# EAGLE board clock (EAGLE 9.6.1)

Size 160 x 100 mm. Coordinates in mm from the lower left corner, seen from the top.
Outline: 0,0 160,0 160,100 0,100 0,0
Copper layers (1*16): Top 0.035mm / dielectric 1.5mm / Bottom 0.035mm
Design rules "default": minimum track width 6mil, minimum drill 0.35mm, track to track 6mil, track to pad 6mil, pad to pad 6mil, via to via 6mil, smd to smd 6mil, copper to edge 40mil, drill to drill 6mil, minimum pad ring 10mil, minimum via ring 8mil, stop-mask expansion 4mil, vias tented up to drill 0mil, thermal gap 10mil

## Footprints (pad centres in the part's own frame; a part is rotated, then mirrored left to right if it is on the bottom)
N14 = drill 0.787 pad 1.295 square: 1 -7.62,15.24 | drill 0.787 pad 1.295: 2 -7.62,12.7; 3 -7.62,10.16; 4 -7.62,7.62; 5 -7.62,5.08; 6 -7.62,2.54; 7 -7.62,0; 8 0,0; 9 0,2.54; 10 0,5.08; 11 0,7.62; 12 0,10.16; 13 0,12.7; 14 0,15.24
N16 = drill 0.787 pad 1.295 square: 1 -7.62,17.78 | drill 0.787 pad 1.295: 2 -7.62,15.24; 3 -7.62,12.7; 4 -7.62,10.16; 5 -7.62,7.62; 6 -7.62,5.08; 7 -7.62,2.54; 8 -7.62,0; 9 0,0; 10 0,2.54; 11 0,5.08; 12 0,7.62; 13 0,10.16; 14 0,12.7; 15 0,15.24; 16 0,17.78

## Placement (x,y rotation side)
AND1  SN74F08N  [N14]  -76.2,67.31 0 top  (outside the outline)
AND2  SN74F08N  [N14]  -88.9,67.31 0 top  (outside the outline)
HI_MIN_ADDER  SN74LS283N  [N16]  -36.83,22.86 0 top  (outside the outline)
HI_MIN_AND  SN74F08N  [N14]  -63.5,67.31 0 top  (outside the outline)
HI_MIN_REG  SN74LS194AN  [N16]  -38.1,1.27 0 top  (outside the outline)
HI_SEC_MUX  CD4052BE  [N16]  -77.47,44.45 0 top  (outside the outline)
HR_ADDER  SN74LS283N  [N16]  -19.05,44.45 0 top  (outside the outline)
HR_AND  SN74F08N  [N14]  -17.78,87.63 0 top  (outside the outline)
HR_REG  SN74LS194AN  [N16]  -54.61,1.27 0 top  (outside the outline)
JKFF0  SN74HC109N  [N16]  -52.07,22.86 0 top  (outside the outline)
LO_MIN_MUX  CD4052BE  [N16]  -63.5,44.45 0 top  (outside the outline)
LO_SEC_ADDER  SN74LS283N  [N16]  -21.59,1.27 0 top  (outside the outline)
LO_SEC_AND  SN74F08N  [N14]  -49.53,67.31 0 top  (outside the outline)
LO_SEC_REG  SN74LS194AN  [N16]  -71.12,1.27 0 top  (outside the outline)
MS_ADDER  SN74LS283N  [N16]  -34.29,44.45 0 top  (outside the outline)
MS_AND  SN74F08N  [N14]  -30.48,87.63 0 top  (outside the outline)
MS_REG  SN74LS194AN  [N16]  -87.63,1.27 0 top  (outside the outline)
MUX1  SN74HC157N  [N16]  -67.31,22.86 0 top  (outside the outline)
MUX2  SN74HC157N  [N16]  -82.55,22.86 0 top  (outside the outline)
NAND0  SN74HC00N  [N14]  -92.71,45.72 0 top  (outside the outline)
NAND1  SN74HC00N  [N14]  -19.05,67.31 0 top  (outside the outline)
OR0  SN74F32N  [N14]  -43.18,87.63 0 top  (outside the outline)
OR1  SN74F32N  [N14]  -55.88,87.63 0 top  (outside the outline)
OR2  SN74F32N  [N14]  -68.58,87.63 0 top  (outside the outline)
SPLI_REG  SN74LS194AN  [N16]  -20.32,22.86 0 top  (outside the outline)
SPLIT_ADDER  SN74LS283N  [N16]  -49.53,44.45 0 top  (outside the outline)
U1  SN74HC109N  [N16]  -97.79,22.86 0 top  (outside the outline)
U2  SN74HC00N  [N14]  -34.29,67.31 0 top  (outside the outline)

## Library data of the parts
AND1 AND2 HI_MIN_AND HR_AND LO_SEC_AND MS_AND = sn74f08n; DATASHEET_URL: http://www.ti.com/lit/gpn/SN74F08; DESCRIPTION: Quadruple 2-Input Positive-AND Gate; FAMILY_NAME: AND GATE; GENERIC_PART_NUMBER: SN74F08; INDUSTRY_STD_PKG_TYPE: PDIP; MANUFACTURER: Texas Instruments; PACKAGE_DESIGNATOR: N; PIN_COUNT: 14
HI_MIN_ADDER HR_ADDER LO_SEC_ADDER MS_ADDER SPLIT_ADDER = sn74ls283n; DATASHEET_URL: http://www.ti.com/lit/gpn/SN74LS283; DESCRIPTION: 4-Bit Binary Full Adders With Fast Carry; FAMILY_NAME: ADDER; GENERIC_PART_NUMBER: SN74LS283; INDUSTRY_STD_PKG_TYPE: PDIP; MANUFACTURER: Texas Instruments; PACKAGE_DESIGNATOR: N; PIN_COUNT: 16
HI_MIN_REG HR_REG LO_SEC_REG MS_REG SPLI_REG = sn74ls194an; DATASHEET_URL: http://www.ti.com/lit/gpn/SN74LS194A; DESCRIPTION: Bidirectional universal shift registers; FAMILY_NAME: SHIFT REGISTER; GENERIC_PART_NUMBER: SN74LS194A; INDUSTRY_STD_PKG_TYPE: PDIP; MANUFACTURER: Texas Instruments; PACKAGE_DESIGNATOR: N; PIN_COUNT: 16
HI_SEC_MUX LO_MIN_MUX = cd4052be; DATASHEET_URL: http://www.ti.com/lit/gpn/CD4052B; DESCRIPTION: CMOS Differential 4-Channel Analog Multiplexer/Demultiplexer with Logic-Level Conversion; FAMILY_NAME: ANALOG SWITCH/MULTIPLEXER (greater than 5V); GENERIC_PART_NUMBER: CD4052B; INDUSTRY_STD_PKG_TYPE: PDIP; MANUFACTURER: Texas Instruments; PACKAGE_DESIGNATOR: N; PIN_COUNT: 16
JKFF0 U1 = sn74hc109n; DATASHEET_URL: http://www.ti.com/lit/gpn/SN74HC109; DESCRIPTION: Dual J-K Positive-Edge-Triggered Flip-Flops With Clear and Preset; FAMILY_NAME: J-K FLIPFLOP; GENERIC_PART_NUMBER: SN74HC109; INDUSTRY_STD_PKG_TYPE: PDIP; MANUFACTURER: Texas Instruments; PACKAGE_DESIGNATOR: N; PIN_COUNT: 16
MUX1 MUX2 = sn74hc157n; DATASHEET_URL: http://www.ti.com/lit/gpn/SN74HC157; DESCRIPTION: Quadruple 2-Line To 1-Line Data Selectors/Multiplexers; FAMILY_NAME: DATA SELECTOR/MULTIPLEXER; GENERIC_PART_NUMBER: SN74HC157; INDUSTRY_STD_PKG_TYPE: PDIP; MANUFACTURER: Texas Instruments; PACKAGE_DESIGNATOR: N; PIN_COUNT: 16
NAND0 NAND1 U2 = sn74hc00n; DATASHEET_URL: http://www.ti.com/lit/gpn/SN74HC00; DESCRIPTION: Quad 2-Input Positive-NAND Gates; FAMILY_NAME: NAND GATE; GENERIC_PART_NUMBER: SN74HC00; INDUSTRY_STD_PKG_TYPE: PDIP; MANUFACTURER: Texas Instruments; PACKAGE_DESIGNATOR: N; PIN_COUNT: 14
OR0 OR1 OR2 = sn74f32n; DATASHEET_URL: http://www.ti.com/lit/gpn/SN74F32; DESCRIPTION: Quad 2-input positive-OR gates; FAMILY_NAME: OR GATE; GENERIC_PART_NUMBER: SN74F32; INDUSTRY_STD_PKG_TYPE: PDIP; MANUFACTURER: Texas Instruments; PACKAGE_DESIGNATOR: N; PIN_COUNT: 14

## Nets
1_HZ: MUX1.2 MUX1.5 NAND0.11 U1.4 U1.12
+5V: AND1.14 AND2.14 HI_MIN_ADDER.16 HI_MIN_AND.14 HI_MIN_REG.16 HI_SEC_MUX.16 HR_ADDER.7 HR_ADDER.16 HR_AND.14 HR_REG.16 JKFF0.5 JKFF0.16 LO_MIN_MUX.16 LO_SEC_ADDER.7 LO_SEC_ADDER.16 LO_SEC_AND.14 LO_SEC_REG.16 MS_ADDER.7 MS_ADDER.16 MS_AND.14 MS_REG.9 MS_REG.10 MS_REG.16 MUX1.16 MUX2.16 NAND0.14 NAND1.14 OR0.14 OR1.14 OR2.14 SPLI_REG.16 SPLIT_ADDER.15 SPLIT_ADDER.16 U1.2 U1.5 U1.11 U1.16 U2.14
ADD_1HR: OR2.9 OR2.12
ADD_1MIN: OR1.4
ADD_5MIN: OR1.5
AM: JKFF0.6
CLK: HI_MIN_REG.11 HR_REG.11 JKFF0.4 LO_SEC_REG.11 MS_REG.11 SPLI_REG.11
CLKEN_INV: MUX1.1 MUX2.1
CLR_SEC_INV: NAND0.5 OR0.2 OR0.10
GND: AND1.7 AND2.7 HI_MIN_ADDER.3 HI_MIN_ADDER.6 HI_MIN_ADDER.8 HI_MIN_ADDER.11 HI_MIN_ADDER.14 HI_MIN_AND.7 HI_MIN_REG.8 HI_SEC_MUX.4 HI_SEC_MUX.5 HI_SEC_MUX.6 HI_SEC_MUX.7 HI_SEC_MUX.8 HI_SEC_MUX.11 HI_SEC_MUX.14 HR_ADDER.3 HR_ADDER.6 HR_ADDER.8 HR_AND.7 HR_REG.8 JKFF0.8 LO_MIN_MUX.2 LO_MIN_MUX.4 LO_MIN_MUX.6 LO_MIN_MUX.7 LO_MIN_MUX.8 LO_MIN_MUX.11 LO_MIN_MUX.15 LO_SEC_ADDER.3 LO_SEC_ADDER.6 LO_SEC_ADDER.8 LO_SEC_AND.7 LO_SEC_REG.8 MS_ADDER.3 MS_ADDER.6 MS_ADDER.8 MS_ADDER.11 MS_ADDER.14 MS_AND.7 MS_REG.8 MUX1.8 MUX2.8 MUX2.15 NAND0.7 NAND1.7 OR0.7 OR1.7 OR2.7 SPLI_REG.8 SPLIT_ADDER.2 SPLIT_ADDER.6 SPLIT_ADDER.8 SPLIT_ADDER.11 U1.3 U1.8 U2.7
HI_MIN_ADD_2: AND1.2 HI_MIN_ADDER.13 HI_MIN_AND.1
HI_MIN_ADD_!: AND2.12 HI_MIN_ADDER.1 HI_MIN_AND.9
HI_MIN_ADD_MSB: AND1.1 HI_MIN_ADDER.10 HI_MIN_AND.5
HI_MIN_QA: HI_MIN_ADDER.12 HI_MIN_REG.15 HR_REG.7
HI_MIN_QB: HI_MIN_ADDER.15 HI_MIN_REG.14
HI_MIN_QC: HI_MIN_ADDER.2 HI_MIN_REG.13
HI_MIN_QD: HI_MIN_ADDER.5 HI_MIN_REG.12
HI_MIN_RST_INV: HI_MIN_AND.2 HI_MIN_AND.4 HI_MIN_AND.10 HI_MIN_AND.12 NAND1.6
HI_MIN_S0: HI_MIN_REG.9 MUX2.7
HI_MIN_S1: HI_MIN_REG.10 MUX2.4
HR_ADD_1: HR_ADDER.1 HR_AND.9 OR2.4
HR_ADD_2: HR_ADDER.13 HR_AND.1 OR2.5
HR_ADD_MSB: AND1.10 HR_ADDER.10 HR_AND.5
HR_QA: HR_ADDER.12 HR_REG.15
HR_QB: HR_ADDER.15 HR_REG.14
HR_QC: HR_ADDER.2 HR_REG.13
HR_QD: HI_MIN_REG.2 HR_ADDER.5 HR_REG.12
HR_RST_INV: HR_AND.2 HR_AND.4 HR_AND.10 HR_AND.12 NAND1.3
HR_S0: HR_REG.9 MUX2.12
HR_S1: HR_REG.10 MUX2.9
LO_SEC_ADD_1: LO_SEC_ADDER.1 LO_SEC_AND.9
LO_SEC_ADD_2: AND2.2 LO_SEC_ADDER.13 LO_SEC_AND.1
LO_SEC_M1: MUX1.3 MUX1.10 OR0.3
LO_SEC_M2: MUX1.6 MUX1.13 OR0.8
LO_SEC_QA: LO_SEC_ADDER.12 LO_SEC_REG.15 SPLI_REG.7
LO_SEC_QB: LO_SEC_ADDER.15 LO_SEC_REG.14
LO_SEC_QC: LO_SEC_ADDER.2 LO_SEC_REG.13
LO_SEC_QD: LO_SEC_ADDER.5 LO_SEC_REG.12 MS_REG.2
LO_SEC_RST_INV: LO_SEC_AND.2 LO_SEC_AND.4 LO_SEC_AND.10 LO_SEC_AND.12 NAND0.8
LO_SEC_S0: LO_SEC_REG.9 MUX1.7
LO_SEC_S1: LO_SEC_REG.10 MUX1.4
M0: OR0.9 OR1.12 OR2.13
M1: OR0.1 OR1.10 OR2.10
MS_ADD_1: MS_ADDER.13 MS_AND.1 OR0.12
MS_ADD_2: MS_ADDER.4 MS_AND.9 OR0.13
MS_ADD_MSB: MS_ADDER.10 MS_AND.5 NAND0.1
MS_QA: LO_SEC_REG.7 MS_ADDER.12 MS_REG.15
MS_QB: MS_ADDER.15 MS_REG.14
MS_QC: MS_ADDER.2 MS_REG.13
MS_QD: MS_ADDER.5 MS_REG.12
MS_RST_INV: MS_AND.2 MS_AND.4 MS_AND.10 MS_AND.12 NAND0.6
MVOE: LO_MIN_MUX.14 SPLIT_ADDER.13
N$1: HR_AND.6 HR_REG.3
N$2: HR_AND.3 HR_REG.4
N$3: HR_AND.11 HR_REG.5
N$4: HR_AND.8 HR_REG.6
N$5: HR_ADDER.4 HR_AND.13
N$6: MS_AND.6 MS_REG.3
N$7: MS_AND.3 MS_REG.4
N$8: MS_AND.11 MS_REG.5
N$9: MS_AND.8 MS_REG.6
N$10: MS_ADDER.1 MS_AND.13
N$11: NAND0.2 OR0.11
N$12: LO_SEC_AND.6 LO_SEC_REG.3
N$13: LO_SEC_AND.3 LO_SEC_REG.4
N$14: HR_ADDER.11 HR_ADDER.14
N$15: LO_SEC_AND.11 LO_SEC_REG.5
N$16: LO_SEC_AND.8 LO_SEC_REG.6
N$17: LO_SEC_ADDER.4 LO_SEC_AND.13
N$18: LO_SEC_ADDER.11 LO_SEC_ADDER.14
N$19: HI_MIN_AND.6 HI_MIN_REG.3
N$20: HI_MIN_AND.3 HI_MIN_REG.4
N$21: HI_MIN_AND.11 HI_MIN_REG.5
N$22: HI_MIN_AND.8 HI_MIN_REG.6
N$23: AND2.13 HI_MIN_ADDER.4 HI_MIN_AND.13
N$25: MUX1.9 SPLI_REG.10
N$26: MUX1.12 SPLI_REG.9
N$28: MUX1.11 MUX1.14
N$29: HI_MIN_ADDER.7 SPLIT_ADDER.9
N$30: HI_SEC_MUX.3 SPLI_REG.6
N$31: AND1.9 OR2.6
N$32: LO_MIN_MUX.3 SPLI_REG.3
N$34: AND1.5 AND2.11
N$35: MUX2.13 OR2.11
N$36: AND2.5 AND2.8
N$37: AND2.6 OR1.1
N$38: HI_SEC_MUX.9 LO_MIN_MUX.9 MUX2.2 MUX2.5 NAND0.9 NAND0.10 OR1.3
N$39: OR1.2 OR1.6 OR1.9 OR1.13
N$40: AND2.9 HI_SEC_MUX.1 HI_SEC_MUX.2 SPLIT_ADDER.4
N$41: AND2.10 HI_SEC_MUX.12 HI_SEC_MUX.15 SPLIT_ADDER.1
N$42: HI_SEC_MUX.13 SPLI_REG.5
N$43: LO_MIN_MUX.13 SPLI_REG.4
N$44: LO_MIN_MUX.5 SPLIT_ADDER.10
N$45: MUX2.10 OR2.8
N$47: AND1.3 AND1.4
N$48: NAND0.3 NAND0.4 NAND0.12 NAND0.13
N$50: AND1.6 HI_SEC_MUX.10 LO_MIN_MUX.10 MUX2.11 MUX2.14 NAND1.4 NAND1.5
N$51: MUX2.3 OR1.8
N$52: MUX2.6 OR1.11
N$53: AND2.3 AND2.4
N$54: AND1.8 NAND1.1 NAND1.2 OR2.2
N$55: AND2.1 LO_SEC_ADDER.10 LO_SEC_AND.5
N$57: JKFF0.2 NAND1.9 NAND1.10 OR2.3
N$58: JKFF0.3 NAND1.8
PM: JKFF0.7
RST_INV: HI_MIN_REG.1 HR_REG.1 JKFF0.1 LO_SEC_REG.1 MS_REG.1 SPLI_REG.1 U1.1 U1.15
SL_IN: MS_REG.7
SPLIT_QA: HI_MIN_REG.7 LO_MIN_MUX.1 SPLI_REG.15 SPLIT_ADDER.12
SPLIT_QB: LO_MIN_MUX.12 SPLI_REG.14 SPLIT_ADDER.14
SPLIT_QC: SPLI_REG.13 SPLIT_ADDER.3
SPLIT_QD: LO_SEC_ADDER.9 LO_SEC_REG.2 SPLI_REG.12 SPLIT_ADDER.5 SPLIT_ADDER.7
SR_IN: HR_REG.2
T_AM_PM: OR2.1

## Tracks (layer width: path | path; a pad name or v marks a point on that pad's centre or on a via)
1_HZ  (4 unrouted)
+5V  (37 unrouted)
ADD_1HR  (1 unrouted)
CLK  (5 unrouted)
CLKEN_INV  (1 unrouted)
CLR_SEC_INV  (2 unrouted)
GND  (56 unrouted)
HI_MIN_ADD_2  (2 unrouted)
HI_MIN_ADD_!  (2 unrouted)
HI_MIN_ADD_MSB  (2 unrouted)
HI_MIN_QA  (2 unrouted)
HI_MIN_QB  (1 unrouted)
HI_MIN_QC  (1 unrouted)
HI_MIN_QD  (1 unrouted)
HI_MIN_RST_INV  (4 unrouted)
HI_MIN_S0  (1 unrouted)
HI_MIN_S1  (1 unrouted)
HR_ADD_1  (2 unrouted)
HR_ADD_2  (2 unrouted)
HR_ADD_MSB  (2 unrouted)
HR_QA  (1 unrouted)
HR_QB  (1 unrouted)
HR_QC  (1 unrouted)
HR_QD  (2 unrouted)
HR_RST_INV  (4 unrouted)
HR_S0  (1 unrouted)
HR_S1  (1 unrouted)
LO_SEC_ADD_1  (1 unrouted)
LO_SEC_ADD_2  (2 unrouted)
LO_SEC_M1  (2 unrouted)
LO_SEC_M2  (2 unrouted)
LO_SEC_QA  (2 unrouted)
LO_SEC_QB  (1 unrouted)
LO_SEC_QC  (1 unrouted)
LO_SEC_QD  (2 unrouted)
LO_SEC_RST_INV  (4 unrouted)
LO_SEC_S0  (1 unrouted)
LO_SEC_S1  (1 unrouted)
M0  (2 unrouted)
M1  (2 unrouted)
MS_ADD_1  (2 unrouted)
MS_ADD_2  (2 unrouted)
MS_ADD_MSB  (2 unrouted)
MS_QA  (2 unrouted)
MS_QB  (1 unrouted)
MS_QC  (1 unrouted)
MS_QD  (1 unrouted)
MS_RST_INV  (4 unrouted)
MVOE  (1 unrouted)
N$1  (1 unrouted)
N$2  (1 unrouted)
N$3  (1 unrouted)
N$4  (1 unrouted)
N$5  (1 unrouted)
N$6  (1 unrouted)
N$7  (1 unrouted)
N$8  (1 unrouted)
N$9  (1 unrouted)
N$10  (1 unrouted)
N$11  (1 unrouted)
N$12  (1 unrouted)
N$13  (1 unrouted)
N$14  (1 unrouted)
N$15  (1 unrouted)
N$16  (1 unrouted)
N$17  (1 unrouted)
N$18  (1 unrouted)
N$19  (1 unrouted)
N$20  (1 unrouted)
N$21  (1 unrouted)
N$22  (1 unrouted)
N$23  (2 unrouted)
N$25  (1 unrouted)
N$26  (1 unrouted)
N$28  (1 unrouted)
N$29  (1 unrouted)
N$30  (1 unrouted)
N$31  (1 unrouted)
N$32  (1 unrouted)
N$34  (1 unrouted)
N$35  (1 unrouted)
N$36  (1 unrouted)
N$37  (1 unrouted)
N$38  (6 unrouted)
N$39  (3 unrouted)
N$40  (3 unrouted)
N$41  (3 unrouted)
N$42  (1 unrouted)
N$43  (1 unrouted)
N$44  (1 unrouted)
N$45  (1 unrouted)
N$47  (1 unrouted)
N$48  (3 unrouted)
N$50  (6 unrouted)
N$51  (1 unrouted)
N$52  (1 unrouted)
N$53  (1 unrouted)
N$54  (3 unrouted)
N$55  (2 unrouted)
N$57  (3 unrouted)
N$58  (1 unrouted)
RST_INV  (7 unrouted)
SPLIT_QA  (3 unrouted)
SPLIT_QB  (2 unrouted)
SPLIT_QC  (1 unrouted)
SPLIT_QD  (4 unrouted)